# Altium PCB Glucometer-I.C.- Full V1.PcbDoc
Units mm, origin at the board's own origin, x right, y up, seen from the top; angles counter-clockwise.
Board outline 53.55 x 41.75 mm, 2 copper layers (Top Layer, Bottom Layer); 27 components, 32 nets, 131 pads, 9 vias.
Unrouted connection lines stored in the file: 31.
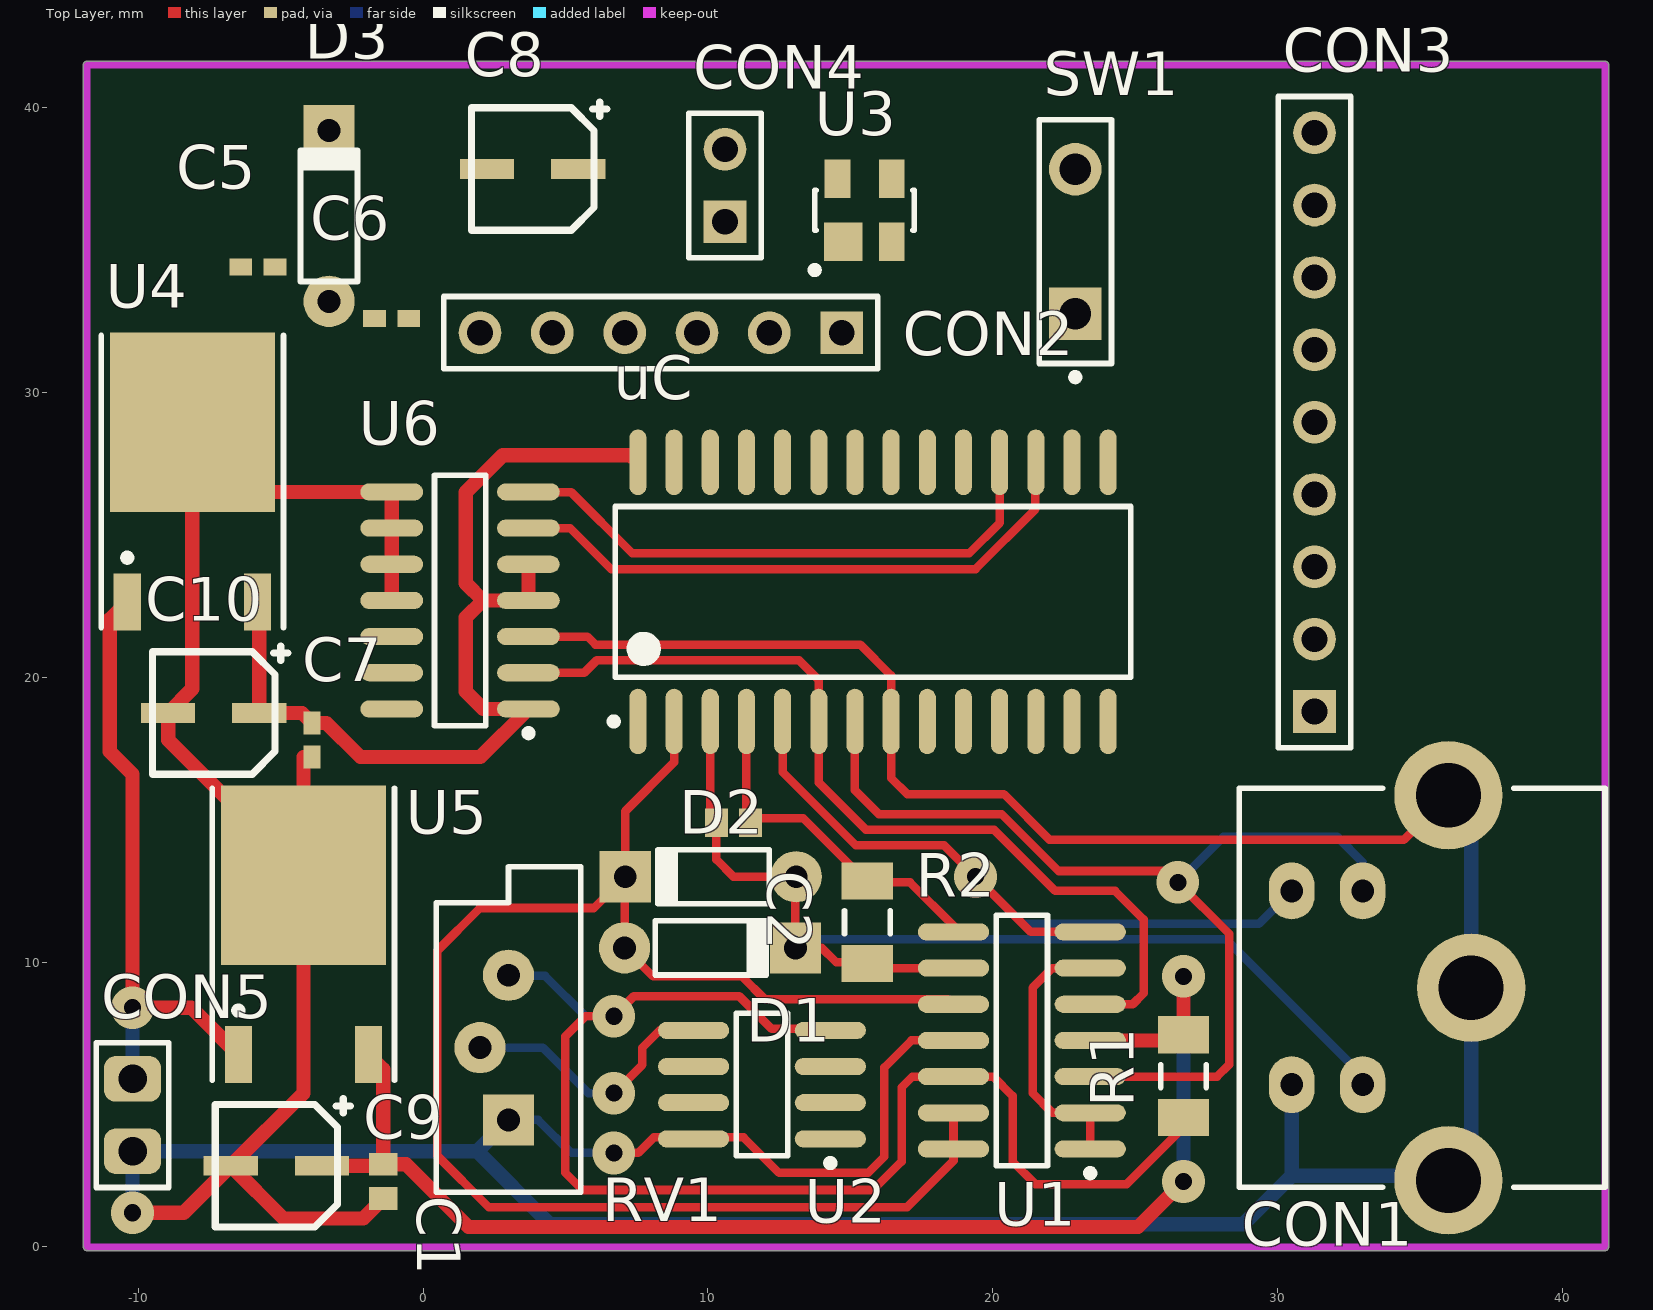
[diagram p0: Top Layer view]
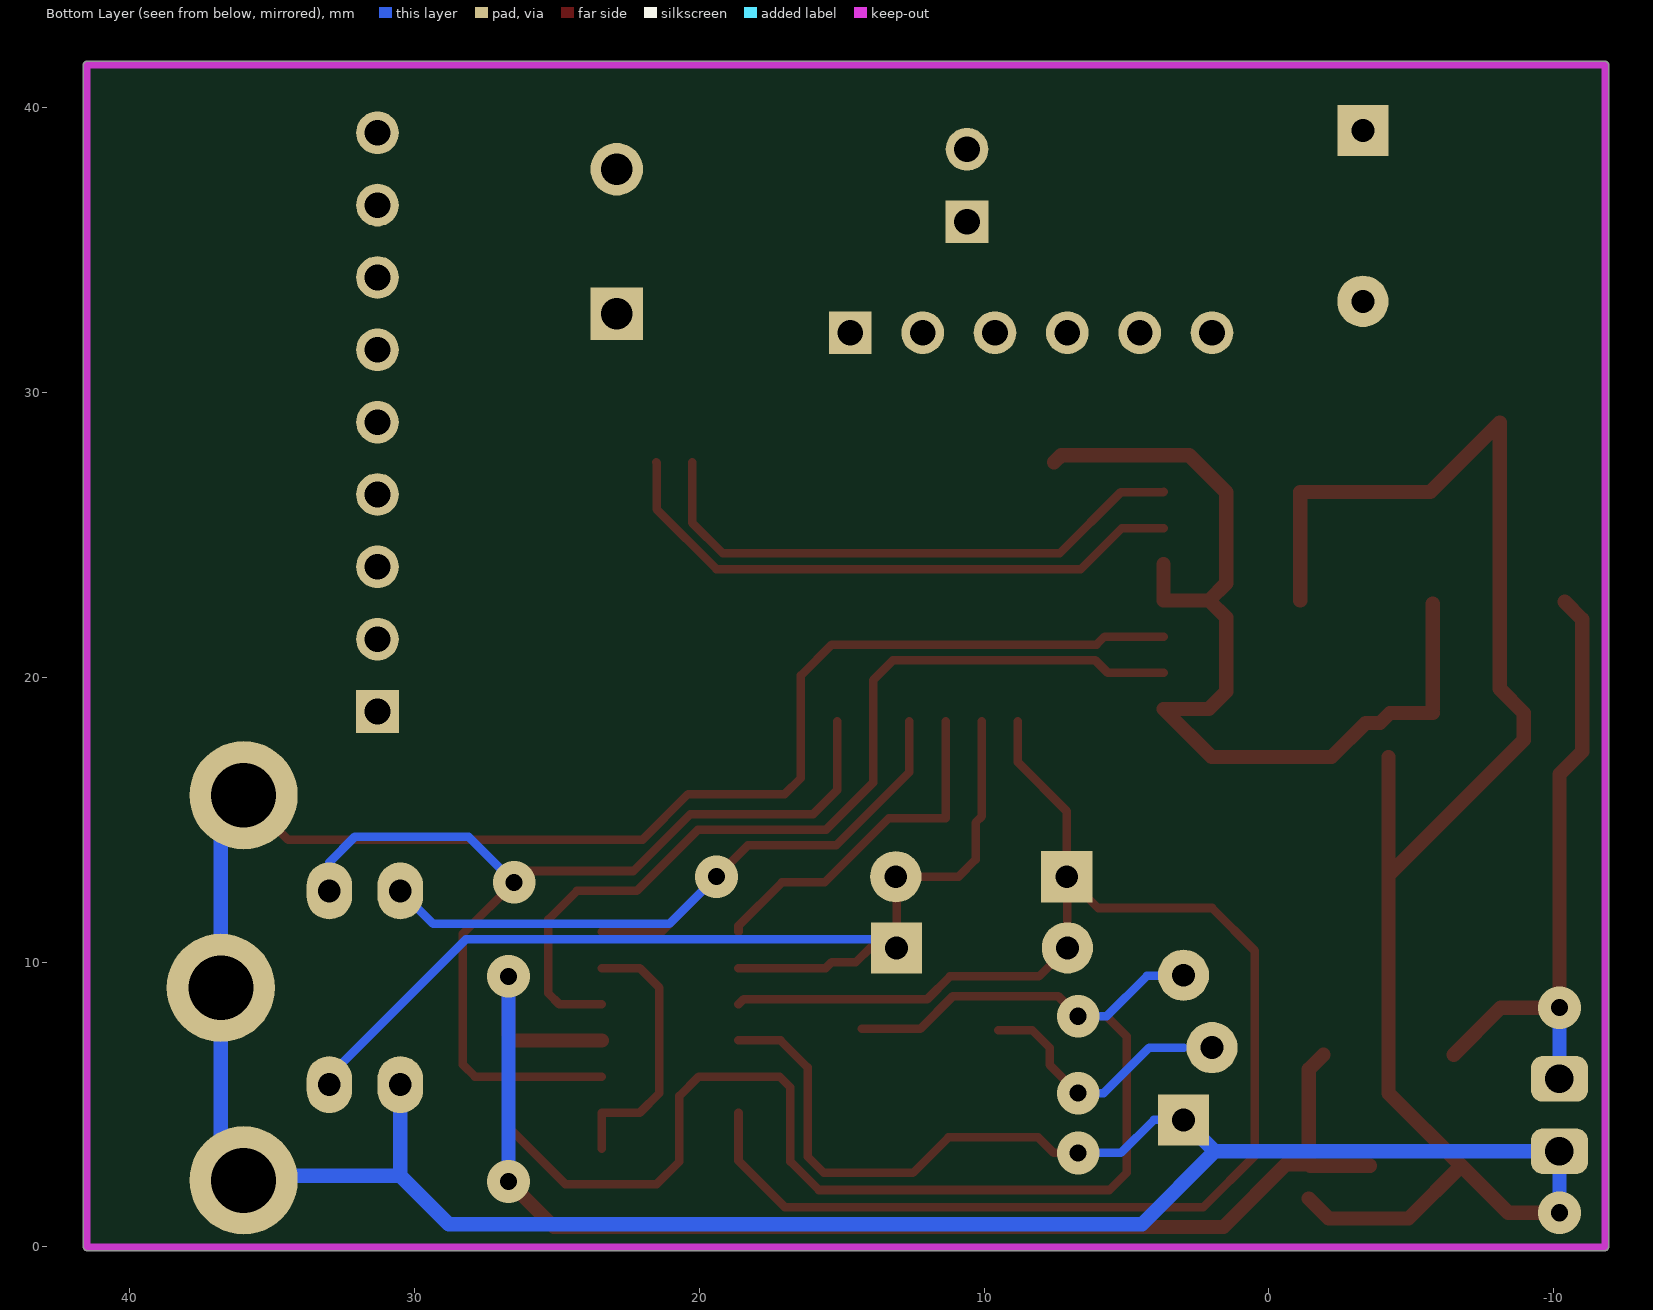
[diagram p1: Bottom Layer view, seen from below]

## Layer stack, top to bottom
Top Layer: signal copper 0.0356
Dielectric: dielectric 0.32, FR-4, Dk 4.8
Bottom Layer: signal copper 0.0356

## Board outline
-11.927,0 ccw(c-11.8,0) -11.8,-0.127 41.5,-0.127 ccw(c41.5,0) 41.627,0 41.627,41.5 ccw(c41.5,41.5) 41.5,41.627 -11.8,41.627 ccw(c-11.8,41.5) -11.927,41.5

## Design rules (kind name [scope] priority, off if disabled: settings)
AssemblyTestPointUsage AssemblyTestPointUsage_1 [All] p2:
AssemblyTestpoint AssemblyTestpoint_1 [All] p2: testpointundercomponent=TRUE minsize=1.016 maxsize=2.54 preferedsize=1.524 minholesize=0 maxholesize=1.016 preferedholesize=0.813 testpointgrid=0.025 usegrid=TRUE gridtolerance=0 allowsidetop=TRUE allowsidebottom=TRUE
Clearance [All] p1: gap=0.25
ComponentClearance ComponentClearance_1 [All] p2: gap=0.254 collisioncheckmode=3 verticalgap=0.254 showdistances=FALSE
DiffPairsRouting DiffPairsRouting_1 [All] p2: maxlimit=0.254 minlimit=0.254 mostfreqgap=0.254 maxuncoupledlength=12.7
FabricationTestPointUsage TestPointUsage [All] p2: valid=0 allowmultiple=FALSE
FabricationTestpoint Testpoint [All] p2: side=3 testpointundercomponent=TRUE minsize=1.016 maxsize=2.54 preferedsize=1.524 minholesize=0 maxholesize=1.016 preferedholesize=0.813 testpointgrid=0.025 allowsidetop=TRUE allowsidebottom=TRUE usegrid=TRUE gridtolerance=0
FanoutControl Fanout_LCC [IsLCC] p1: bgadir=Out bgaviamode=Centered fanoutstyle=Auto fanoutdirection=Alternating viagrid=0.025 // Fanout_LCC (Default Rule)
FanoutControl Fanout_BGA [IsBGA] p2: bgadir=Out bgaviamode=Centered fanoutstyle=Auto fanoutdirection=Alternating viagrid=0.025 // Fanout_BGA (Default Rule)
FanoutControl Fanout_Default [All] p4: bgadir=Out bgaviamode=Centered fanoutstyle=Auto fanoutdirection=Alternating viagrid=0.025 // Fanout_Default (Default Rule)
FanoutControl Fanout_Small [(CompPinCount < 5)] p5: bgadir=Out bgaviamode=Centered fanoutstyle=Auto fanoutdirection=OutThenIn viagrid=0.025 // Fanout_Small (Default Rule)
FanoutControl Fanout_BGA_1 [IsBGA] p6: bgadir=Out bgaviamode=Centered fanoutstyle=Auto fanoutdirection=Alternating viagrid=0.025 // Fanout_BGA (Default Rule)
FanoutControl Fanout_LCC_1 [IsLCC] p7: bgadir=Out bgaviamode=Centered fanoutstyle=Auto fanoutdirection=Alternating viagrid=0.025 // Fanout_LCC (Default Rule)
FanoutControl Fanout_SOIC_1 [IsSOIC] p8: bgadir=Out bgaviamode=Centered fanoutstyle=Auto fanoutdirection=Alternating viagrid=0.025 // Fanout_SOIC (Default Rule)
FanoutControl Fanout_Small_1 [(CompPinCount < 5)] p9: bgadir=Out bgaviamode=Centered fanoutstyle=Auto fanoutdirection=OutThenIn viagrid=0.025 // Fanout_Small (Default Rule)
FanoutControl Fanout_Default_1 [All] p10: bgadir=Out bgaviamode=Centered fanoutstyle=Auto fanoutdirection=Alternating viagrid=0.025 // Fanout_Default (Default Rule)
Height Height_1 [All] p2: minheight=0 maxheight=25.4 prefheight=12.7
HoleSize [All] p1: absolutevalues=TRUE maxlimit=5 minlimit=0.025 maxpercent=80.000 minpercent=20.000
HoleSize HoleSize_1 [All] p2: absolutevalues=TRUE maxlimit=5 minlimit=0.025 maxpercent=80.000 minpercent=20.000
HoleToHoleClearance HoleToHoleClearance_1 [All] p2: gap=0.254 allowstackedmicrovias=TRUE
LayerPairs LayerPairs_1 [All] p2: enforce=TRUE
MinimumSolderMaskSliver MinimumSolderMaskSliver_1 [All] p2: minsoldermaskwidth=0.254
NetAntennae NetAntennae_1 [All] p2: netantennaetolerance=0
PasteMaskExpansion PasteMaskExpansion_1 [All] p2: expansion=0
PlaneClearance PlaneClearance_1 [All] p2: clearance=0.508
PolygonConnect [All] p1: connectstyle=Relief reliefconductorwidth=0.254 reliefentries=4 polygonreliefangle="90 Angle" airgapwidth=0.254
PolygonConnect PolygonConnect_1 [All] p2: connectstyle=Relief reliefconductorwidth=0.254 reliefentries=4 polygonreliefangle="90 Angle" airgapwidth=0.254
RoutingPriority RoutingPriority_1 [All] p2: routingpriority=0
RoutingTopology RoutingTopology_1 [All] p2: topology=Shortest
RoutingVias [All] p1: holewidth=0.8 width=1.5 viastyle="Through Hole" minholewidth=0.7 minwidth=1 maxholewidth=1 maxwidth=2
ShortCircuit ShortCircuit_1 [All] p2: allowed=FALSE
SilkToSilkClearance SilkToSilkClearance_1 [All] p2: silktosilkclearance=0.254
SilkToSolderMaskClearance SilkscreenOverComponentPads [IsPad] p2: minsilkscreentomaskgap=0.254 clearancetoexposedcopper=TRUE
SolderMaskExpansion [All] p1: expansion=0.102
SolderMaskExpansion SolderMaskExpansion_1 [All] p2: expansion=0.102
UnRoutedNet UnRoutedNet_1 [All] p2:
Width [All] p1: maxlimit=5 minlimit=0.25 preferedwidth=0.3 minimp=50.000000 maximp=50.000000 favimp=50.000000
23 further rules are at their usual default settings.

## Components (designator, comment, footprint, x,y, rotation, side; value= is the part's Value field where it differs from the comment)
C1 "Cap2" CAPC1005N#1 -1.4,2.3 r270 top
C2 "Cap2" CAPC1005N#1 10.9,14.9 r0 top
C5 "Cap" CAPC1005N#2 -5.8,34.4 r0 top
C6 "Cap" CAPC1005N#2 -1.1,32.6 r0 top
C7 "Cap" CAPC1005N#2 -3.9,17.8 r90 top
C8 "Cap Pol1" C-4x4 1.7,35.7 r0 top
C9 "Cap Pol1" C-4x4 -7.3,0.7 r0 top
C10 "Cap Pol1" C-4x4 -9.5,16.6 r0 top
CON1 "" CDIN2.6-3H4A 41.5,9.1 r180 top
CON2 "Header 6" HDR1X6 14.7,32.1 r180 top
CON3 "Header 9" HDR1X9 31.3,18.8 r90 top
CON4 "Header 2" HDR1X2#1 10.6,36 r90 top
CON5 "Header 2" HDR1X2#2 -10.2,5.9 r270 top
D1 "1N4148" DO-35#1 10.1,10.5 r0 top
D2 "1N4148" DO-35#2 10.2,13 r180 top
D3 "1N4148" DO-35#3 -3.3,36.2 r90 top
R1 "Res1" RESC3216N 26.7,6 r90 top
R2 "Res1" RESC3216N 15.6,11.4 r270 top
RV1 "RPot" VR5 3,7 r90 top
SW1 "SW-PB" SPST-2 22.9,35.3 r90 top
U1 "LMC6044IN" M14A_N 21.025,7.25 r180 top
U2 "LM385BM" M08A_N 11.9,5.7 r180 top
U3 "SMT811TW16F" SOT143 15.5,36.4 r0 top
U4 "µA78M33CKVURG3" KTP02 -8.1,25.8 r0 top
U5 "µA78M05CKTPR" KTP02 -4.2,9.9 r0 top
U6 "AD5241" R-14_N 1.3,22.7 r180 top
uC "PIC24FJ64GA102-I/SO" SOIC-SO28_N 15.8,23 r90 top

## Footprints (in the part's own frame and the unit in brackets; to place one, negate y for a bottom-side part, rotate by r counter-clockwise, add the part's x,y. Pads: shape width x height; smd on the part's side, far side on the other; paste and mask are expansions set on the pad)
C-4x4 [mm] "SMD Polar Aluminium Capacitor, 4x4mm, 10V"
  rect 1.9x0.7 smd: 1(3.75,2.15) 2(0.55,2.15)
  silkscreen extent 0,0 4.75,4.5, body extent 0,0 4.3,4.3, height 5.4
CAPC1005N#1 [mm] "Chip Capacitor, Body 1.0x0.5mm, IPC Medium Density"
  rect 0.8x1 smd: 1(-0.6,0) 2(0.6,0)
  body extent -0.55,-0.3 0.55,0.3, height 0.6
CAPC1005N#2 [mm] "Chip Capacitor, Body 1.0x0.5mm, IPC Medium Density"
  rect 0.8x0.6 smd: 1(-0.6,0) 2(0.6,0)
  body extent -0.55,-0.3 0.55,0.3, height 0.6
CDIN2.6-3H4A [mm] "Connector; Circular DIN, Thru-Hole; 4 Position; Right Angle; Pitch 2.1/2.6 mm; Body 14 x 12.84 x 13 mm (WxTxH), Shielded, Special PCB Retention"
  oval 1.6x2 hole 0.8: 1(8.51,-3.4) 2(8.51,3.4) 3(11,-3.4) 4(11,3.4)
  round 3.8 hole 2.28: MH1(5.5,-6.76) MH2(4.7,0) MH3(5.5,6.76)
  silkscreen extent 0,-7 12.84,7, body extent 0,-7 12.84,7, height 13
DO-35#1 [mm] "Diode, Axial; Body 3.8 x 1.9 mm (LxDia. max), Lead Dia. 0.53 mm (max)"
  round 1.8 hole 0.8: 1(-3.025,0)
  rect 1.8x1.8 hole 0.8: 2(2.975,0)
  silkscreen extent -1.95,-0.95 2.05,0.95
DO-35#2 [mm] "Diode, Axial; Body 3.8 x 1.9 mm (LxDia. max), Lead Dia. 0.53 mm (max)"
  round 1.8 hole 0.8: 1(-2.9,0)
  rect 1.8x1.8 hole 0.8: 2(3.1,0)
  silkscreen extent -1.95,-0.95 2.05,0.95
DO-35#3 [mm] "Diode, Axial; Body 4.6 x 2 mm (LxDia. max), Lead Dia. 0.53 mm (max)"
  round 1.8 hole 0.8: 1(-3,0)
  rect 1.8x1.8 hole 0.8: 2(3,0)
  silkscreen extent -2.3,-1 2.4,1
HDR1X2#1 [mm] "Connector; Header; 2 Position"
  rect 1.5x1.5 hole 0.9: 1(0,0)
  round 1.5 hole 0.9: 2(2.54,0)
  silkscreen extent -1.27,-1.27 3.81,1.27
HDR1X2#2 [mm] "Connector; Header; 2 Position"
  rrect50% 1.6x2 hole 1: 1(0,0) 2(2.54,0)
  silkscreen extent -1.27,-1.27 3.81,1.27
HDR1X6 [mm] "Connector; Header; 6 Position"
  rect 1.5x1.5 hole 0.9: 1(0,0)
  round 1.5 hole 0.9: 2(2.54,0) 3(5.08,0) 4(7.62,0) 5(10.16,0) 6(12.7,0)
  silkscreen extent -1.27,-1.27 13.97,1.27
HDR1X9 [mm] "Connector; Header; 9 Position"
  rect 1.5x1.5 hole 0.9: 1(0,0)
  round 1.5 hole 0.9: 2(2.54,0) 3(5.08,0) 4(7.62,0) 5(10.16,0) 6(12.7,0) 7(15.24,0) 8(17.78,0) 9(20.32,0)
  silkscreen extent -1.27,-1.27 21.59,1.27
KTP02 [mm] "PowerFLEX (D-PAK/TO-252-AA); 3 Leads (1 Cropped); Body 9.7 (inc. leads) x 6.2 mm (LxW max)"
  rect 0.95x2 smd: 1(-2.285,-3.15) 3(2.285,-3.15)
  rect 5.8x6.3 smd: 4(0,3.15)
  silkscreen extent -3.2,-4.05 3.2,6.2
M08A_N [mm] "SOIC, 8-Leads, Body 4.9x3.9mm, Pitch 1.27mm, IPC Medium Density"
  oval 2.5x0.6 smd: 1(-2.4,1.905) 2(-2.4,0.635) 3(-2.4,-0.635) 4(-2.4,-1.905) 5(2.4,-1.905) 6(2.4,-0.635) 7(2.4,0.635) 8(2.4,1.905)
  silkscreen extent -2.53,-2.5 0.9,2.88, body extent -2,-2.5 2,2.5, height 1.75
M14A_N [mm] "SOIC, 14-Leads, Body 8.6x3.9mm, Pitch 1.27mm, IPC Medium Density"
  oval 2.5x0.6 smd: 1(-2.4,3.81) 2(-2.4,2.54) 3(-2.4,1.27) 4(-2.4,0) 5(-2.4,-1.27) 6(-2.4,-2.54) 7(-2.4,-3.81) 8(2.4,-3.81) 9(2.4,-2.54) 10(2.4,-1.27) 11(2.4,0) 12(2.4,1.27) 13(2.4,2.54) 14(2.4,3.81)
  silkscreen extent -2.53,-4.4 0.9,4.78, body extent -2,-4.38 2,4.38, height 1.75
R-14_N [mm] "14-Pin Narrow Body Small Outline Integrated Circuit 1.27 mm Pitch, IPC Medium Density"
  oval 2.2x0.6 smd: 1(-2.4,3.81) 2(-2.4,2.54) 3(-2.4,1.27) 4(-2.4,0) 5(-2.4,-1.27) 6(-2.4,-2.54) 7(-2.4,-3.81) 8(2.4,-3.81) 9(2.4,-2.54) 10(2.4,-1.27) 11(2.4,0) 12(2.4,1.27) 13(2.4,2.54) 14(2.4,3.81)
  silkscreen extent -2.53,-4.4 0.9,4.78, body extent -1.95,-4.33 1.95,4.33, height 1.75
RESC3216N [mm] "Chip Resistor, Body 3.2x1.6mm, IPC Medium Density"
  rect 1.3x1.8 smd: 1(-1.45,0) 2(1.45,0)
  silkscreen extent -0.4,-0.8 0.4,0.8, body extent -1.68,-0.87 1.68,0.87, height 0.71
SOIC-SO28_N [mm] "SOIC, 28-Leads, Body 17.9x7.5mm, Pitch 1.27mm, IPC Medium Density"
  oval 2.3x0.6 smd: 1(-4.55,8.255) 2(-4.55,6.985) 3(-4.55,5.715) 4(-4.55,4.445) 5(-4.55,3.175) 6(-4.55,1.905) 7(-4.55,0.635) 8(-4.55,-0.635) 9(-4.55,-1.905) 10(-4.55,-3.175) 11(-4.55,-4.445) 12(-4.55,-5.715) 13(-4.55,-6.985) 14(-4.55,-8.255) 15(4.55,-8.255) 16(4.55,-6.985) 17(4.55,-5.715) 18(4.55,-4.445) 19(4.55,-3.175) 20(4.55,-1.905) 21(4.55,-0.635) 22(4.55,0.635) 23(4.55,1.905) 24(4.55,3.175) 25(4.55,4.445) 26(4.55,5.715) 27(4.55,6.985) 28(4.55,8.255)
  silkscreen extent -4.67,-9.05 3,9.23, body extent -3.8,-9.06 3.8,9.06, height 2.65
SOT143 [mm] "SOT-143; 4 Leads; Body 3 x 2.6 mm, inc. leads (LxW max)"
  rect 1.35x1.35 smd: 1(-0.75,-1.1)
  rect 0.9x1.35 smd: 2(0.95,-1.1) 3(0.95,1.1) 4(-0.95,1.1)
  silkscreen extent -1.87,-2.22 1.75,0.7
SPST-2 [mm] "Switch; 2 Leads"
  rect 1.85x1.85 hole 1.1: 1(-2.54,0)
  round 1.85 hole 1.1: 2(2.54,0)
  silkscreen extent -4.89,-1.27 4.28,1.27
VR5 [mm] "Thru-Hole; 3 Leads"
  rect 1.8x1.8 hole 0.8: 1(-2.54,0)
  round 1.8 hole 0.8: 2(0,1) 3(2.54,0)
  silkscreen extent -5.08,-2.54 6.35,2.54

## Part data
C1 C2 C5 C6 C7: "Capacitor"
C8 C9 C10: "Polarized Capacitor (Radial)"
CON1: library part "MiniDin 4Pins - SuperVideo", "MiniDin 4 Pins"
CON2: "Header, 6-Pin"
CON3: "Header, 9-Pin"
CON4 CON5: "Header, 2-Pin"
D1 D2 D3: "High Conductance Fast Diode"
R1 R2: "Resistor"
RV1: "Potentiometer"
SW1: "Switch"
U1: "CMOS Quad Micropower Operational Amplifier, 14-pin MDIP"
U2: "Adjustable Micropower Voltage Reference, 8-pin Narrow SOIC"
U3: "Reset Circuit, 3.08V, Push Pull Inverted RST"
U4 U5: "Positive-Voltage Regulator"
U6: "AD5241BR"
uC: "General purpose 16-bit Flash Microcontroller with nanoWatt XLP, 64KB Flash, 8KB SRAM, 28-Pin SOIC, Industrial Temperature"

## Via types
v1: diameter 1.5, hole 0.6, Top Layer to Bottom Layer, 9 vias

## Nets (pads, with @x,y where several pads share a name; then routed paths per layer and width w, separated by ;. In a path a pad name is that pad's centre, name@x,y a point inside that pad or via, vN(x,y) a via of type N, cw(c..) or ccw(c..) an arc to the next point about the centre after c; other vN are vias at no path point)
3.3V: C5.2 C6.2 C7.2 C10.1 CON2.2 CON3.7 U3.4 U4.3 U6.1 U6.4 U6.5 uC.13 uC.28 | length 34
  Top Layer w0.5: C10.1 -4.25,18.75 C7.2 -3.4,18.4 -2.2,17.2 2.01,17.2 U6.1 2.11,18.89 1.5,19.5 1.5,22.1 2.1,22.7 ; C10.1@-5.75,18.9 U4.3@-5.75,22.585 ; U6.5 U6.4 2.1,22.7 ; uC.28 7.295,27.8 2.8,27.8 1.5,26.5 1.5,23.3 2.1,22.7
5V: C1.1 C9.1 R1.2 U1.4 U5.3 | length 48.2
  Top Layer w0.5: C9.1 C1.1@-1.45,2.85 ; U5.3 -1.4,6.235 C1.1 -0.6,2.9 1.6,0.7 25.1,0.7 v1(26.7,2.3) ; U1.4 R1.2@26.5,7.25 ; R1.2 v1(26.7,9.5)
  Bottom Layer w0.5: v1(26.7,2.3) v1(26.7,9.5)
GND: C1.2 C5.1 C6.1 C7.1 C8.2 C9.2 C10.2 CON1.4 CON1.MH1 CON1.MH2 CON1.MH3 CON2.3 CON3.6 CON5.2 RV1.1 SW1.1 U1.11 U2.8 U3.1 U4.4 U5.4 U6.3 U6.8 U6.9 U6.10 U6.11 uC.8 uC.19 uC.27 | length 183.7
  Top Layer w0.3: U6.3 5.77,21.43 6.05,21.15 15.35,21.15 16.435,20.065 uC.8 16.435,16.465 17,15.9 20.393,15.9 21.993,14.3 34.44,14.3 CON1.MH1 ; v1(6.7,3.3) 7.555,3.3 8.1,3.845 11.255,3.845 12.5,2.6 15.625,2.6 16.2,3.175 16.2,6.3 17.15,7.25 U1.11
  Top Layer w0.5: v1(-10.2,1.2) -8.4,1.2 C9.2 ; C7.1@-4.2,17.2 U5.4 ; C1.2 -2.1,1 -4.9,1 C9.2 ; U6.11 U6.10 U6.9 U6.8 -5.66,26.51 U4.4 -8.1,19.6 C10.2 -8.95,17.8 U5.4 ; C9.2 -4.2,5.4 U5.4
  Bottom Layer w0.3: RV1.1 4.04,4.46 5.2,3.3 v1(6.7,3.3)
  Bottom Layer w0.5: v1(-10.2,1.2) CON5.2 1.9,3.36 ; RV1.1 1.9,3.36 ; CON1.4 30.5,2.5 ; CON1.MH1 36.8,15.06 CON1.MH2 36.8,3.14 CON1.MH3 35.84,2.5 30.5,2.5 ; 1.9,3.36 4.46,0.8 28.8,0.8 30.5,2.5
NetC2_1: C2.1 CON1.2 D1.2 D2.1 R2.2 U1.9 uC.3 | length 38.7
  Top Layer w0.3: uC.3 10.085,15.115 C2.1 10.3,13.6 10.9,13 D2.1 13.075,12.975 D1.2 14,10.5 14.5,10 15.35,10 15.56,9.79 U1.9
  Bottom Layer w0.3: D1.2 13.375,10.8 28.2,10.8 32.99,6.01 CON1.2
NetC2_2: C2.2 R2.1 U1.8 uC.4 | length 12.5
  Top Layer w0.3: uC.4 11.355,15.045 13.355,15.045 15.6,12.8 17.1,12.8 18.625,11.275 U1.8
NetC8_1: C8.1 uC.20
NetCON1_1: CON1.1 U1.3 uC.7 | length 35.8
  Top Layer w0.3: uC.7 15.165,16.035 16,15.2 20.315,15.2 22.315,13.2 26.1,13.2 v1(26.5,12.8) 28.3,11 28.3,6.4 27.88,5.98 U1.3
  Bottom Layer w0.3: v1(26.5,12.8) 28.1,14.4 32.1,14.4 32.99,13.51 CON1.1
NetCON1_3: CON1.3 U1.7 uC.5 | length 27.2
  Top Layer w0.3: uC.5 12.625,16.675 15.2,14.1 18.3,14.1 v1(19.4,13) 21.34,11.06 U1.7
  Bottom Layer w0.3: v1(19.4,13) 21.05,11.35 29.35,11.35 CON1.3
NetCON2_1: CON2.1 D3.2 uC.1
NetCON2_4: CON2.4 uC.21
NetCON2_5: CON2.5 uC.22
NetCON3_1: CON3.1 uC.9
NetCON3_2: CON3.2 uC.10
NetCON3_3: CON3.3 uC.12
NetCON3_4: CON3.4 uC.11
NetCON3_5: CON3.5 uC.14
NetCON3_8: CON3.8 uC.16
NetCON3_9: CON3.9 uC.15
NetCON4_1: CON4.1 uC.23
NetCON4_2: CON4.2 uC.24
NetD3_1: D3.1 U3.2
NetR1_1: R1.1 RV1.3 U1.12 U2.4 | length 48.7
  Top Layer w0.3: U2.4@14.3,7.655 12.245,7.655 11.1,8.8 7.4,8.8 v1(6.7,8.1) 5.7,8.1 5,7.4 5,2.6 5.6,2 15.803,2 16.8,2.997 16.8,5.6 17.18,5.98 U1.12 20.02,5.98 20.7,5.3 20.7,3 21.5,2.2 24.7,2.2 26.7,4.2 R1.1
  Bottom Layer w0.3: RV1.3@3,9.515 4.285,9.515 5.7,8.1 v1(6.7,8.1)
NetRV1_3: RV1.2 U2.5 | length 8.4
  Top Layer w0.3: v1(6.7,5.4) 7.7,6.4 7.7,7 8.305,7.605 U2.5
  Bottom Layer w0.3: 3,7 4.2,7 5.8,5.4 v1(6.7,5.4)
NetSW1_2: SW1.2 U3.3
NetU1_1: U1.1 U1.2 U1.6 | length 9.6
  Top Layer w0.3: U1.1 U1.2 22.09,4.71 21.4,5.4 21.4,9.1 22.09,9.79 U1.6
NetU1_5: U1.5 U6.2 uC.6 | length 32.3
  Top Layer w0.3: U6.2 5.66,20.16 6.1,20.6 13.2,20.6 13.895,19.905 uC.6 13.895,16.305 15.55,14.65 20.05,14.65 22.2,12.5 24.3,12.5 25.3,11.5 25.3,8.9 24.92,8.52 U1.5
NetU6_6: U6.6 uC.17 | length 20.9
  Top Layer w0.3: U6.6 5.16,25.24 6.6,23.8 19.4,23.8 21.5,25.9 21.5,27.535 uC.17
NetU6_7: U6.7 uC.18 | length 20
  Top Layer w0.3: U6.7 3.71,26.5 5.2,26.5 7.35,24.35 19.172,24.35 20.245,25.423 uC.18
NetuC_25: uC.25
NetuC_26: uC.26
VDD: CON5.1 U4.1 U5.1 | length 21.7
  Top Layer w0.5: U4.1 -11,22.035 -11,17.4 -10.2,16.6 v1(-10.2,8.4) -8.135,8.4 U5.1
  Bottom Layer w0.5: CON5.1 v1(-10.2,8.4)
VGND: D1.1 D2.2 U1.10 U1.13 U1.14 uC.2 | length 57.1
  Top Layer w0.3: D2.2 7.1,15.3 8.815,17.015 uC.2 ; U1.13 U1.14 18.625,3.025 17,1.4 2.3,1.4 0.5,3.2 0.5,10.4 2,11.9 6,11.9 7.075,12.975 D1.1 8.075,9.5 11.2,9.5 12,8.7 18.445,8.7 U1.10
pads on no net: CON2.6 U2.1 U2.2 U2.3 U2.6 U2.7 U6.12 U6.13 U6.14

## Keep-outs
Keep-Out Layer:
  lines w0.254: -11.8,0 -11.8,41.5 41.5,41.5 41.5,0 -11.8,0

## Silkscreen, mask and mechanical layers (free items; w line width, h text height)
Top Overlay:
  region: 98.5,16.7 98.618,45.45 72.019,45.559 71.9,16.81
Mechanical 16:
  lines w0.127: -135.475,-31.275 -130.395,-31.275 ; -135.475,22.7 -130.395,22.7 ; -135.475,76.675 -130.395,76.675 ; -65.625,-85.25 -65.625,-80.17 ; -65.625,125.57 -65.625,130.65 ; 4.225,-85.25 4.225,-80.17 ; 4.225,125.57 4.225,130.65 ; 74.075,-85.25 74.075,-80.17 ; 74.075,125.57 74.075,130.65 ; 138.845,-31.275 143.925,-31.275 ; 138.845,22.7 143.925,22.7 ; 138.845,76.675 143.925,76.675 ; -135.475,-85.25 143.925,-85.25 143.925,130.65 -135.475,130.65 -135.475,-85.25 ; -130.395,-80.17 -130.395,125.57 138.845,125.57 138.845,-80.17 -130.395,-80.17
  text "1" at -101.151,127.221 h1.78
  text "2" at -31.284,127.221 h1.78
  text "3" at 38.439,127.221 h1.78
  text "4" at 108.314,127.221 h1.78
  text "A" at -133.57,101.364 h1.78
  text "A" at 140.75,101.364 h1.78
  text "B" at 141.125,50.05 h1.78
  text "B" at -133.57,47.389 h1.78
  text "C" at -133.57,-6.586 h1.78
  text "C" at 140.75,-6.586 h1.78
  text "D" at -133.57,-60.434 h1.78
  text "D" at 140.75,-60.434 h1.78
  text "1" at -101.151,-83.599 h1.78
  text "2" at -31.284,-83.599 h1.78
  text "3" at 38.439,-83.599 h1.78
  text "4" at 108.314,-83.599 h1.78

## Dimensions
-11.8,41.5 to 41.5,41.5 on Keep-Out Layer
-11.8,41.5 to -11.8,0 on Keep-Out Layer

## Text inside footprints (layer, text, board x,y; h text height)
CON1: Mechanical 1 "PCB Edge" at 40.9,15.8 h0.25 r270